# Altium PCB QFN68_DIP72_SMT_PCB_45gradi.PcbDoc
Units mm, origin at the board's own origin, x right, y up, seen from the top; angles counter-clockwise.
Board outline 35 x 90 mm, 2 copper layers (Top Layer, Bottom Layer); 3 components, 68 nets, 137 pads, 25 vias.
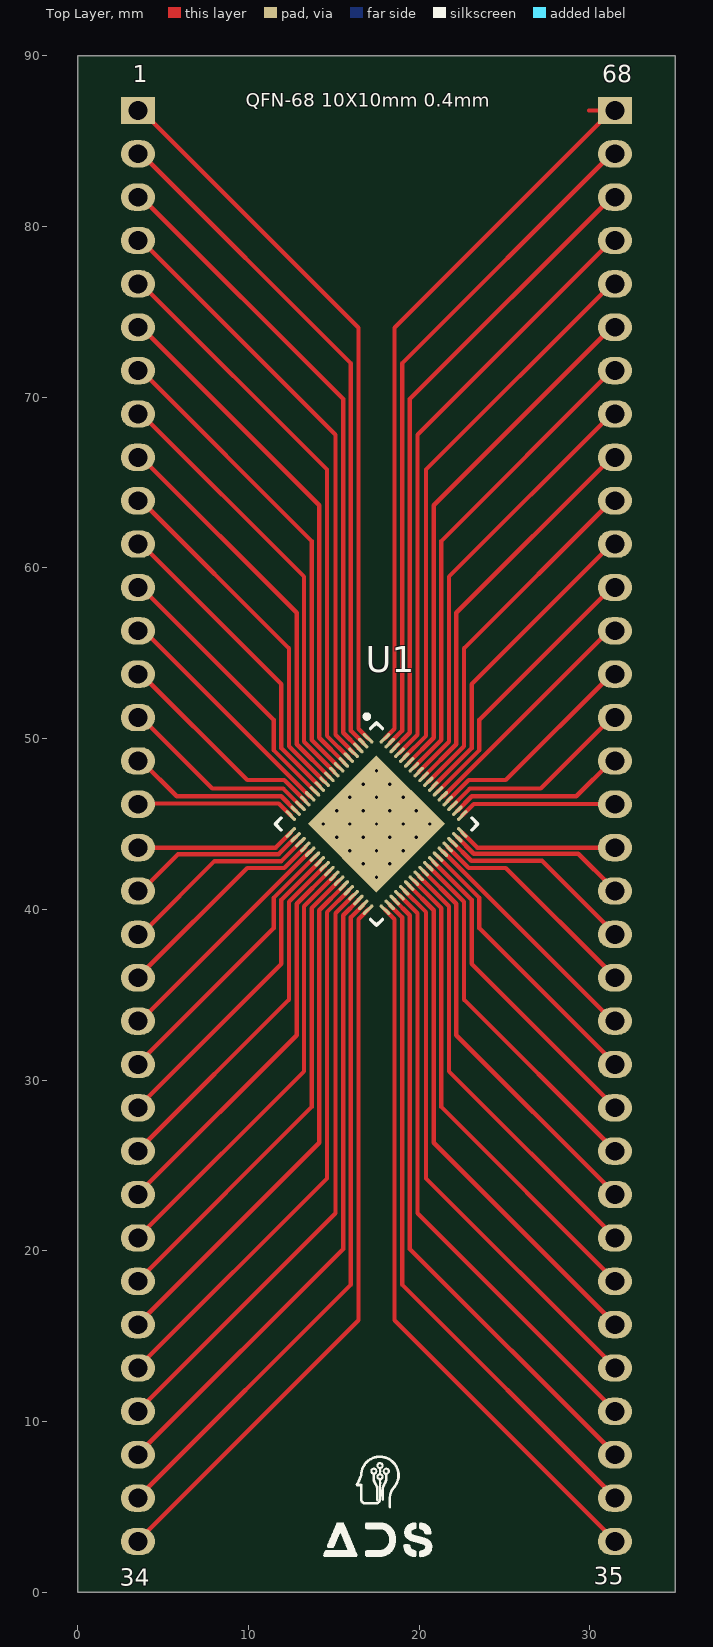
[diagram p0: Top Layer view]
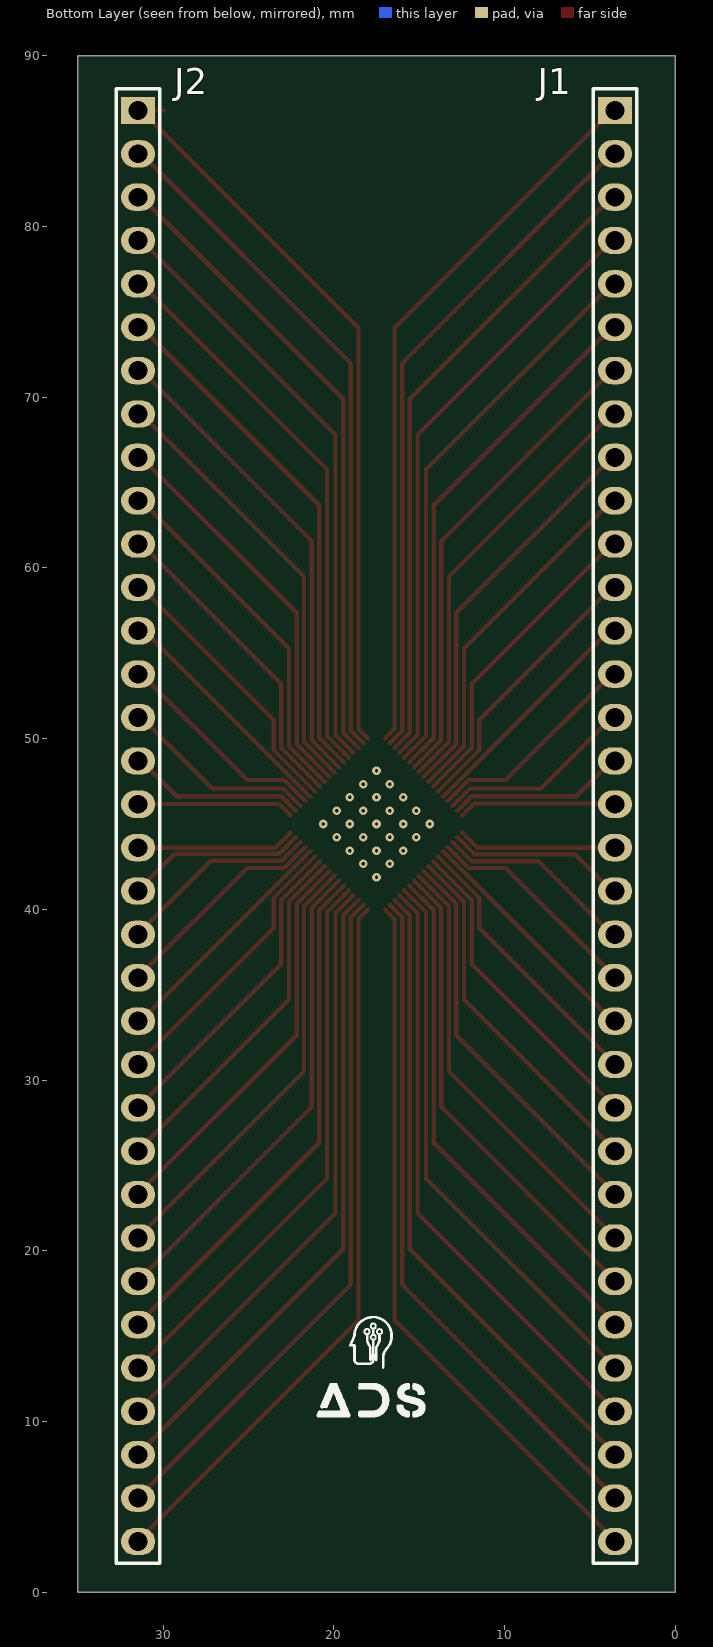
[diagram p1: Bottom Layer view, seen from below]

## Layer stack, top to bottom
Top Solder: solder mask 0.0102, Solder Resist, Dk 3.5
Top Layer: signal copper 0.0356
Dielectric 1: dielectric 0.32, FR-4, Dk 4.8
Bottom Layer: signal copper 0.0356
Bottom Solder: solder mask 0.0102, Solder Resist, Dk 3.5

## Board outline
0,0 35,0 35,90 0,90

## Design rules (kind name [scope] priority, off if disabled: settings)
Clearance [All] p1: gap=0.254 ignorepadtopadclearanceinfootprint=FALSE except(0: Arc-Hole Track-Hole SMDPad-Hole THPad-Hole Via-Hole Fill-Hole Poly-Hole Region-Hole Text-Hole; 0.01: Arc-SMDPad Arc-THPad Arc-Via Arc-Fill Arc-Poly Arc-Region Arc-Text Track-SMDPad Track-THPad Track-Via Track-Fill Track-Poly Track-Region Track-Text; 0.1: Arc-Arc Arc-Track Track-Track)
PolygonConnect [All] p1: connectstyle=Relief reliefconductorwidth=0.254 reliefentries=4 polygonreliefangle="90 Angle" airgapwidth=0.254
RoutingVias [All] p1: holewidth=0.711 width=1.27 viastyle="Through Hole" minholewidth=0.711 minwidth=1.27 maxholewidth=0.711 maxwidth=1.27
SolderMaskExpansion [All] p1: expansion=0.102 istentingtop=FALSE
Width [All] p1: maxlimit=0.254 minlimit=0.254 preferedwidth=0.254
30 further rules are at their usual default settings.

## Components (designator, comment, footprint, x,y, rotation, side; value= is the part's Value field where it differs from the comment)
J1 "HEADER MALE 34PIN" HDR_MALE_1x4_2.54mm 3.525,86.795 r180 bottom
J2 "HEADER MALE 34PIN" HDR_MALE_1x4_2.54mm 31.465,86.795 r180 bottom
U1 "CY8C5888LTQ-LP097" CYP-LTX68_L 17.5,45 r315 top

## Footprints (in the part's own frame and the unit in brackets; to place one, negate y for a bottom-side part, rotate by r counter-clockwise, add the part's x,y. Pads: shape width x height; smd on the part's side, far side on the other; paste and mask are expansions set on the pad)
CYP-LTX68_L [mm] "QFN, 68-Leads, Body 8x8mm, Pitch 0.4mm, Thermal Pad 5.7x5.7mm, IPC High Density"
  oval 0.8x0.2 smd: 1(-3.9,3.2) 2(-3.9,2.8) 3(-3.9,2.4) 4(-3.9,2) 5(-3.9,1.6) 6(-3.9,1.2) 7(-3.9,0.8) 8(-3.9,0.4) 9(-3.9,0) 10(-3.9,-0.4) 11(-3.9,-0.8) 12(-3.9,-1.2) 13(-3.9,-1.6) 14(-3.9,-2) 15(-3.9,-2.4) 16(-3.9,-2.8) 17(-3.9,-3.2) 35(3.9,-3.2) 36(3.9,-2.8) 37(3.9,-2.4) 38(3.9,-2) 39(3.9,-1.6) 40(3.9,-1.2) 41(3.9,-0.8) 42(3.9,-0.4) 43(3.9,0) 44(3.9,0.4) 45(3.9,0.8) 46(3.9,1.2) 47(3.9,1.6) 48(3.9,2) 49(3.9,2.4) 50(3.9,2.8) 51(3.9,3.2)
  oval 0.2x0.8 smd: 18(-3.2,-3.9) 19(-2.8,-3.9) 20(-2.4,-3.9) 21(-2,-3.9) 22(-1.6,-3.9) 23(-1.2,-3.9) 24(-0.8,-3.9) 25(-0.4,-3.9) 26(0,-3.9) 27(0.4,-3.9) 28(0.8,-3.9) 29(1.2,-3.9) 30(1.6,-3.9) 31(2,-3.9) 32(2.4,-3.9) 33(2.8,-3.9) 34(3.2,-3.9) 52(3.2,3.9) 53(2.8,3.9) 54(2.4,3.9) 55(2,3.9) 56(1.6,3.9) 57(1.2,3.9) 58(0.8,3.9) 59(0.4,3.9) 60(0,3.9) 61(-0.4,3.9) 62(-0.8,3.9) 63(-1.2,3.9) 64(-1.6,3.9) 65(-2,3.9) 66(-2.4,3.9) 67(-2.8,3.9) 68(-3.2,3.9)
  rect 5.7x5.7 smd: 69(0,0)
  silkscreen extent -4.97,-4.2 4.2,4.2, body extent -4.05,-4.05 4.05,4.05, height 1
HDR_MALE_1x4_2.54mm [mm] "HDR FEMALE 1x6 2.54mm"
  rect 2x1.6 / inner rect 2x1.2 / far side rect 2x1.6 hole 1.1: 1(0,0)
  oval 2x1.6 / inner oval 2x1.2 / far side oval 2x1.6 hole 1.1: 2(0,-2.54) 3(0,-5.08) 4(0,-7.62) 5(0,-10.16) 6(0,-12.7) 7(0,-15.24) 8(0,-17.78) 9(0,-20.32) 10(0,-22.86) 11(0,-25.4) 12(0,-27.94) 13(0,-30.48) 14(0,-33.02) 15(0,-35.56) 16(0,-38.1) 17(0,-40.64) 18(0,-43.18) 19(0,-45.72) 20(0,-48.26) 21(0,-50.8) 22(0,-53.34) 23(0,-55.88) 24(0,-58.42) 25(0,-60.96) 26(0,-63.5) 27(0,-66.04) 28(0,-68.58) 29(0,-71.12) 30(0,-73.66) 31(0,-76.2) 32(0,-78.74) 33(0,-81.28) 34(0,-83.82)
  silkscreen extent -1.27,-85.09 1.27,1.27, body extent -1.2,-85.09 1.2,1.27, height 10.29

## Part data
J1 J2: library part 77311-101-34LF, "Headers & Wire Housings 34P STR SR TMT HDR .76 AU .425IN LENGTH", Color=Black, Current Rating=3A, Flammability Rating="UL94 V-0", Insulation Resistance=5GR, Manufacturer="Amphenol ICC / FCI", Max Operating Temperature=125°C, Max Voltage Rating (AC)=1.5kV, Min Operating Temperature=-65°C, Package Quantity=100, Supplier Part Number 1=62K8798, Category=Connectors, ComponentLink1Description=https://datasheet.ciiva.com/8050/320503-8050396.pdf?src-supplier=Element14, ComponentLink1URL=https://datasheet.ciiva.com/8050/320503-8050396.pdf?src-supplier=Element14, ComponentLink2Description=https://datasheet.ciiva.com/10116/77311-10116809.pdf?src-supplier=Avnet, ComponentLink2URL=https://datasheet.ciiva.com/10116/77311-10116809.pdf?src-supplier=Avnet, ComponentLink3Description=https://datasheet.ciiva.com/16729/77311-16729755.pdf?src-supplier=Avnet+Europe, ComponentLink3URL=https://datasheet.ciiva.com/16729/77311-16729755.pdf?src-supplier=Avnet+Europe, ComponentLink4Description=https://datasheet.ciiva.com/722/77311-722458.pdf?src-supplier=Digi-Key, ComponentLink4URL=https://datasheet.ciiva.com/722/77311-722458.pdf?src-supplier=Digi-Key, Connector Type="Male Pin", Contact Gender=Male, Contact Material=Bronze, Contact Mating Length=0.23inch, Contact Plating=Gold,GXT, Contact Post Length=2.41mm, Contact Type="Male Pin", Depth=2.4mm, Gender=Male, Housing Color=Black, Housing Material=Thermoplastic, Lead Free="Lead Free", Length=86.36mm, Manufacturer Part Number=77311-101-34LF, Material=Thermoplastic, Mount="Through Hole", Number of Contacts=34, Number of Positions=34, Number of Rows=1, Orientation=Straight, Packaging=Bulk, Pitch=2.54mm, Pricing 1="400=1,25000, 500=1,16000, 1000=1,02000 (USD)", REACH SVHC="No SVHC", RoHS=Yes, Series="BERGSTIK®, MezzSelect™, Basics+", Supplier 1=Newark, Termination=Solder, Voltage Rating=1.5kV
U1: "MCU 32-bit ARM Cortex M3 RISC 256KB Flash 1.8V/3.3V/5V 68-Pin QFN EP Tray", Case/Package=QFN, Frequency=80MHz, Manufacturer=Cypress, Max Operating Temperature=105°C, Min Operating Temperature=-40°C, Supplier Part Number 1=CY8C5888LTQ-LP097-ND, Category=Microcontrollers, ComponentLink1Description=http://www.farnell.com/datasheets/2343841.pdf?src-supplier=Farnell, ComponentLink1URL=http://www.farnell.com/datasheets/2343841.pdf?src-supplier=Farnell, ComponentLink2Description=http://www.mouser.com/ds/2/100/001-84932_PSoC_5LP_CY8C58LP_Family_Datasheet_Progr-1078031.pdf?src-supplier=Mouser, ComponentLink2URL=http://www.mouser.com/ds/2/100/001-84932_PSoC_5LP_CY8C58LP_Family_Datasheet_Progr-1078031.pdf?src-supplier=Mouser, ComponentLink3Description=http://www.cypress.com/?docID=49437&src-supplier=Digi-Key, ComponentLink3URL=http://www.cypress.com/?docID=49437&src-supplier=Digi-Key, Core Architecture=ARM, Interface=I2C,SPI,USB,UART,USART, Manufacturer Part Number=CY8C5888LTQ-LP097, Memory Size=256KB, Memory Type=FLASH, Number of I/Os=38, Oscillator Type=Internal, Packaging=Tray, Peripherals=POR,PWM,WDT,DMA,LCD,CapSense, Pricing 1="1=25,00000, 10=23,12600, 25=21,25080, 80=19,75075, 260=18,12573, 520=17,25069 (USD)", RoHS=Yes, RoHS Compliant=Yes, Stock 1=85, Supplier 1=Digi-Key

## Via types
v1: diameter 0.5, hole 0.2, Top Layer to Bottom Layer, 25 vias

## Nets (pads, with @x,y where several pads share a name; then routed paths per layer and width w, separated by ;. In a path a pad name is that pad's centre, name@x,y a point inside that pad or via, vN(x,y) a via of type N, cw(c..) or ccw(c..) an arc to the next point about the centre after c; other vN are vias at no path point)
NetJ1_1: J1.1 U1.1 | length 42.5
  Top Layer w0.254: J1.1 3.725,86.795 16.45,74.07 16.45,50.575 U1.1
NetJ1_2: J1.2 U1.2 | length 40.3
  Top Layer w0.254: J1.2@3.32,84.255 J1.2 3.725,84.255 16,71.98 16,50.46 U1.2
NetJ1_3: J1.3 U1.3 | length 37.9
  Top Layer w0.254: J1.3@3.32,81.715 J1.3 3.725,81.715 15.55,69.89 15.55,50.344 U1.3
NetJ1_4: J1.4 U1.4 | length 35.6
  Top Layer w0.254: J1.4@3.32,79.175 J1.4 3.725,79.175 15.1,67.8 15.1,50.228 U1.4
NetJ1_5: J1.5 U1.5 | length 33.2
  Top Layer w0.254: J1.5@3.32,76.635 J1.5 3.725,76.635 14.6,65.76 14.6,50.163 U1.5
NetJ1_6: J1.6 U1.6 | length 30.6
  Top Layer w0.254: J1.6 3.725,74.095 14.15,63.67 14.15,50.047 U1.6
NetJ1_7: J1.7 U1.7 | length 28.2
  Top Layer w0.254: J1.7 3.725,71.555 13.7,61.58 13.7,49.931 U1.7
NetJ1_8: J1.8 U1.8 | length 25.9
  Top Layer w0.254: J1.8@3.32,69.015 J1.8@3.36,69.055 ; J1.8 3.725,69.015 13.25,59.49 13.25,49.816 U1.8
NetJ1_9: J1.9 U1.9 | length 23.5
  Top Layer w0.254: J1.9 3.725,66.475 12.825,57.375 12.825,49.675 U1.9
NetJ1_10: J1.10 U1.10 | length 21.1
  Top Layer w0.254: J1.10 3.725,63.935 12.375,55.285 12.375,49.559 U1.10
NetJ1_11: J1.11 U1.11 | length 18.7
  Top Layer w0.254: J1.11 3.725,61.395 11.925,53.195 11.925,49.444 U1.11
NetJ1_12: J1.12 U1.12 | length 16.4
  Top Layer w0.254: J1.12 3.725,58.855 11.475,51.105 11.475,49.328 U1.12
NetJ1_13: J1.13 U1.13 | length 14.1
  Top Layer w0.254: J1.13 3.884,56.315 13.573,46.626 U1.13
NetJ1_14: J1.14 U1.14 | length 12.9
  Top Layer w0.254: J1.14 3.725,53.775 9.925,47.575 12.097,47.575 U1.14
NetJ1_15: J1.15 U1.15 | length 11.7
  Top Layer w0.254: J1.15 3.725,51.235 7.885,47.075 12.031,47.075 U1.15
NetJ1_16: J1.16 U1.16 | length 10.4
  Top Layer w0.254: J1.16 3.725,48.695 5.795,46.625 11.915,46.625 U1.16
NetJ1_17: J1.17 U1.17 | length 9.8
  Top Layer w0.254: J1.17@4.035,46.155 J1.17 3.57,46.2 11.775,46.2 U1.17
NetJ1_18: J1.18 U1.18 | length 9.3
  Top Layer w0.254: J1.18 11.59,43.615 U1.18
NetJ1_19: J1.19 U1.19 | length 10.2
  Top Layer w0.254: J1.19@3.725,41.305 3.955,41.305 5.875,43.225 11.765,43.225 U1.19
NetJ1_20: J1.20 U1.20 | length 11.5
  Top Layer w0.254: J1.20@3.725,38.765 3.955,38.765 8.015,42.825 11.931,42.825 U1.20
NetJ1_21: J1.21 U1.21 | length 12.9
  Top Layer w0.254: J1.21@3.525,36.225 3.725,36.225 9.925,42.425 12.097,42.425 U1.21
NetJ1_22: J1.22 U1.22 | length 14.1
  Top Layer w0.254: J1.22@3.525,33.685 3.884,33.685 13.573,43.374 U1.22
NetJ1_23: J1.23 U1.23 | length 16.4
  Top Layer w0.254: J1.23@3.525,31.145 3.725,31.145 11.475,38.895 11.475,40.672 U1.23
NetJ1_24: J1.24 U1.24 | length 18.7
  Top Layer w0.254: J1.24@3.525,28.605 3.725,28.605 11.925,36.805 11.925,40.556 U1.24
NetJ1_25: J1.25 U1.25 | length 21.1
  Top Layer w0.254: J1.25@3.525,26.065 3.725,26.065 12.375,34.715 12.375,40.441 U1.25
NetJ1_26: J1.26 U1.26 | length 23.5
  Top Layer w0.254: J1.26@3.525,23.525 3.725,23.525 12.825,32.625 12.825,40.325 U1.26
NetJ1_27: J1.27 U1.27 | length 25.9
  Top Layer w0.254: J1.27@3.32,20.985 J1.27@3.36,20.945 ; J1.27@3.525,20.985 3.725,20.985 13.25,30.51 13.25,40.184 U1.27
NetJ1_28: J1.28 U1.28 | length 28.2
  Top Layer w0.254: J1.28@3.525,18.445 3.725,18.445 13.7,28.42 13.7,40.069 U1.28
NetJ1_29: J1.29 U1.29 | length 30.6
  Top Layer w0.254: J1.29@3.525,15.905 3.725,15.905 14.15,26.33 14.15,39.953 U1.29
NetJ1_30: J1.30 U1.30 | length 33.2
  Top Layer w0.254: J1.30@3.32,13.365 3.525,13.365 3.725,13.365 14.6,24.24 14.6,39.837 U1.30
NetJ1_31: J1.31 U1.31 | length 35.6
  Top Layer w0.254: J1.31@3.32,10.825 3.525,10.825 3.725,10.825 15.1,22.2 15.1,39.772 U1.31
NetJ1_32: J1.32 U1.32 | length 37.9
  Top Layer w0.254: J1.32@3.32,8.285 3.525,8.285 3.725,8.285 15.55,20.11 15.55,39.656 U1.32
NetJ1_33: J1.33 U1.33 | length 40.3
  Top Layer w0.254: J1.33@3.32,5.745 3.525,5.745 3.725,5.745 16,18.02 16,39.54 U1.33
NetJ1_34: J1.34 U1.34 | length 42.5
  Top Layer w0.254: J1.34@3.525,3.205 3.725,3.205 16.45,15.93 16.45,39.425 U1.34
NetJ2_1: J2.1 U1.68 | length 43.8
  Top Layer w0.254: U1.68 18.55,50.575 18.55,74.07 31.275,86.795 J2.1@31.475,86.795 ; 29.951,86.795 J2.1@31.26,86.795
NetJ2_2: J2.2 U1.67 | length 40.3
  Top Layer w0.254: U1.67 19,50.46 19,71.98 31.275,84.255 31.475,84.255 J2.2@31.68,84.255
NetJ2_3: J2.3 U1.66 | length 38
  Top Layer w0.254: U1.66 19.45,50.344 19.45,69.89 31.275,81.715 31.475,81.715 J2.3@31.68,81.715 ; J2.3@31.26,81.685 J2.3@31.26,81.715
NetJ2_4: J2.4 U1.65 | length 35.6
  Top Layer w0.254: U1.65 19.9,50.228 19.9,67.8 31.275,79.175 31.475,79.175 J2.4@31.68,79.175 ; J2.4@31.26,79.16 J2.4@31.26,79.175
NetJ2_5: J2.5 U1.64 | length 33.2
  Top Layer w0.254: U1.64 20.4,50.163 20.4,65.76 31.275,76.635 31.475,76.635 J2.5@31.68,76.635
NetJ2_6: J2.6 U1.63 | length 30.7
  Top Layer w0.254: U1.63 20.85,50.047 20.85,63.67 31.275,74.095 J2.6@31.475,74.095 ; J2.6@31.145,74.095 J2.6@31.26,74.095
NetJ2_7: J2.7 U1.62 | length 28.3
  Top Layer w0.254: U1.62 21.3,49.931 21.3,61.58 31.275,71.555 J2.7@31.475,71.555 ; J2.7@31.205,71.555 J2.7@31.26,71.555
NetJ2_8: J2.8 U1.61 | length 26
  Top Layer w0.254: U1.61 21.75,49.816 21.75,59.49 31.275,69.015 J2.8@31.475,69.015 ; J2.8@31.215,69.015 J2.8@31.26,69.015 ; J2.8@31.64,69.055 J2.8@31.68,69.015
NetJ2_9: J2.9 U1.60 | length 23.5
  Top Layer w0.254: U1.60@20.258,47.758 22.175,49.675 22.175,57.375 31.275,66.475 J2.9@31.475,66.475 ; J2.9@31.25,66.475 J2.9@31.26,66.475
NetJ2_10: J2.10 U1.59 | length 21.1
  Top Layer w0.254: U1.59 22.625,49.559 22.625,55.285 31.275,63.935 J2.10@31.475,63.935 ; J2.10@31.245,63.92 J2.10@31.26,63.935
NetJ2_11: J2.11 U1.58 | length 18.8
  Top Layer w0.254: U1.58 23.075,49.444 23.075,53.195 31.275,61.395 J2.11@31.475,61.395 ; J2.11@31.235,61.37 J2.11@31.26,61.395
NetJ2_12: J2.12 U1.57 | length 16.4
  Top Layer w0.254: U1.57 23.525,49.328 23.525,51.105 31.275,58.855 J2.12@31.475,58.855
NetJ2_13: J2.13 U1.56 | length 14.1
  Top Layer w0.254: U1.56 21.427,46.626 31.116,56.315 J2.13@31.475,56.315 ; J2.13@31.255,56.32 J2.13@31.26,56.315
NetJ2_14: J2.14 U1.55 | length 12.9
  Top Layer w0.254: U1.55 22.903,47.575 25.075,47.575 31.275,53.775 J2.14@31.475,53.775
NetJ2_15: J2.15 U1.54 | length 11.7
  Top Layer w0.254: U1.54 22.969,47.075 27.115,47.075 31.275,51.235 J2.15@31.475,51.235 ; J2.15@31.25,51.245 J2.15@31.26,51.235
NetJ2_16: J2.16 U1.53 | length 10.5
  Top Layer w0.254: U1.53 23.085,46.625 29.205,46.625 31.275,48.695 J2.16@31.475,48.695 ; J2.16@31.26,48.695 J2.16@31.26,48.715
NetJ2_17: J2.17 U1.52 | length 9.2
  Top Layer w0.254: U1.52 23.2,46.175 31.445,46.175 J2.17
NetJ2_18: J2.18 U1.51 | length 9.3
  Top Layer w0.254: U1.51 23.41,43.615 J2.18
NetJ2_19: J2.19 U1.50 | length 10.5
  Top Layer w0.254: U1.50 23.199,43.261 29.319,43.261 31.275,41.305 J2.19@31.475,41.305 ; J2.19@31.24,41.095 J2.19@31.26,41.075
NetJ2_20: J2.20 U1.49 | length 11.7
  Top Layer w0.254: U1.49 23.044,42.85 27.19,42.85 31.275,38.765 J2.20@31.475,38.765 ; J2.20@31.2,38.595 J2.20@31.26,38.535
NetJ2_21: J2.21 U1.48 | length 12.9
  Top Layer w0.254: U1.48 22.903,42.425 25.075,42.425 31.275,36.225 J2.21@31.475,36.225
NetJ2_22: J2.22 U1.47 | length 14.2
  Top Layer w0.254: U1.47 21.427,43.374 31.116,33.685 J2.22@31.475,33.685 ; J2.22@31.22,33.495 J2.22@31.26,33.455
NetJ2_23: J2.23 U1.46 | length 16.4
  Top Layer w0.254: U1.46 23.525,40.672 23.525,38.895 31.275,31.145 J2.23@31.475,31.145
NetJ2_24: J2.24 U1.45 | length 18.8
  Top Layer w0.254: U1.45 23.075,40.556 23.075,36.805 31.275,28.605 J2.24@31.475,28.605 ; J2.24@31.24,28.395 J2.24@31.26,28.375
NetJ2_25: J2.25 U1.44 | length 21.2
  Top Layer w0.254: U1.44 22.625,40.441 22.625,34.715 31.275,26.065 J2.25@31.475,26.065 ; J2.25@31.2,25.895 J2.25@31.26,25.835
NetJ2_26: J2.26 U1.43 | length 23.5
  Top Layer w0.254: U1.43@20.258,42.242 22.175,40.325 22.175,32.625 31.275,23.525 J2.26@31.475,23.525
NetJ2_27: J2.27 U1.42 | length 25.9
  Top Layer w0.254: U1.42 21.75,40.184 21.75,30.51 31.275,20.985 J2.27@31.475,20.985 ; J2.27@31.64,20.945 J2.27@31.68,20.985
NetJ2_28: J2.28 U1.41 | length 28.3
  Top Layer w0.254: U1.41 21.3,40.069 21.3,28.42 31.275,18.445 J2.28@31.475,18.445 ; J2.28@31.18,18.295 J2.28@31.26,18.215
NetJ2_29: J2.29 U1.40 | length 30.6
  Top Layer w0.254: U1.40 20.85,39.953 20.85,26.33 31.275,15.905 J2.29@31.475,15.905
NetJ2_30: J2.30 U1.39 | length 33.2
  Top Layer w0.254: U1.39 20.4,39.837 20.4,24.24 31.275,13.365 31.475,13.365 J2.30@31.68,13.365
NetJ2_31: J2.31 U1.38 | length 35.6
  Top Layer w0.254: U1.38 19.9,39.772 19.9,22.2 31.275,10.825 31.475,10.825 J2.31@31.68,10.825
NetJ2_32: J2.32 U1.37 | length 38
  Top Layer w0.254: U1.37 19.45,39.656 19.45,20.11 31.275,8.285 31.475,8.285 J2.32@31.68,8.285 ; J2.32@31.245,8.07 J2.32@31.26,8.055
NetJ2_33: J2.33 U1.36 | length 40.4
  Top Layer w0.254: U1.36 19,39.54 19,18.02 31.275,5.745 31.475,5.745 J2.33@31.68,5.745 ; J2.33@31.215,5.47 J2.33@31.26,5.515
NetJ2_34: J2.34 U1.35 | length 42.5
  Top Layer w0.254: U1.35 18.55,39.425 18.55,15.93 31.275,3.205 J2.34@31.475,3.205
pads on no net: U1.69
copper on no net:
  other v1: 17.5,41.889 16.722,42.667 18.278,42.667 15.944,43.444 17.5,43.444 19.056,43.444 15.167,44.222 16.722,44.222 18.278,44.222 19.833,44.222 14.389,45 15.944,45 17.5,45 19.056,45 20.611,45 15.167,45.778 16.722,45.778 18.278,45.778 19.833,45.778 15.944,46.556 17.5,46.556 19.056,46.556 16.722,47.333 18.278,47.333 17.5,48.111

## Silkscreen, mask and mechanical layers (free items; w line width, h text height)
Top Overlay:
  drawing of 8 lines, arcs and shapes, not listed
  text "QFN-68 10X10mm 0.4mm" at 9.85,87.025 h0.8
  text "35" at 30.22,0.47 h1
  text "34" at 2.47,0.395 h1
Bottom Overlay:
  drawing of 8 lines, arcs and shapes, not listed

## Text inside footprints (layer, text, board x,y; h text height)
J1: Top Overlay "1" at 3.225,88.445 h1
J2: Top Overlay "68" at 30.725,88.445 h1